# Altium PCB PCB1.PcbDoc
Units mm, origin at the board's own origin, x right, y up, seen from the top; angles counter-clockwise.
Board outline 67 x 62 mm, 4 copper layers (Top Layer, Mid-Layer 1, Mid-Layer 2, Bottom Layer), stack 1.448 mm thick; 30 components, 30 nets, 145 pads, 25 vias.
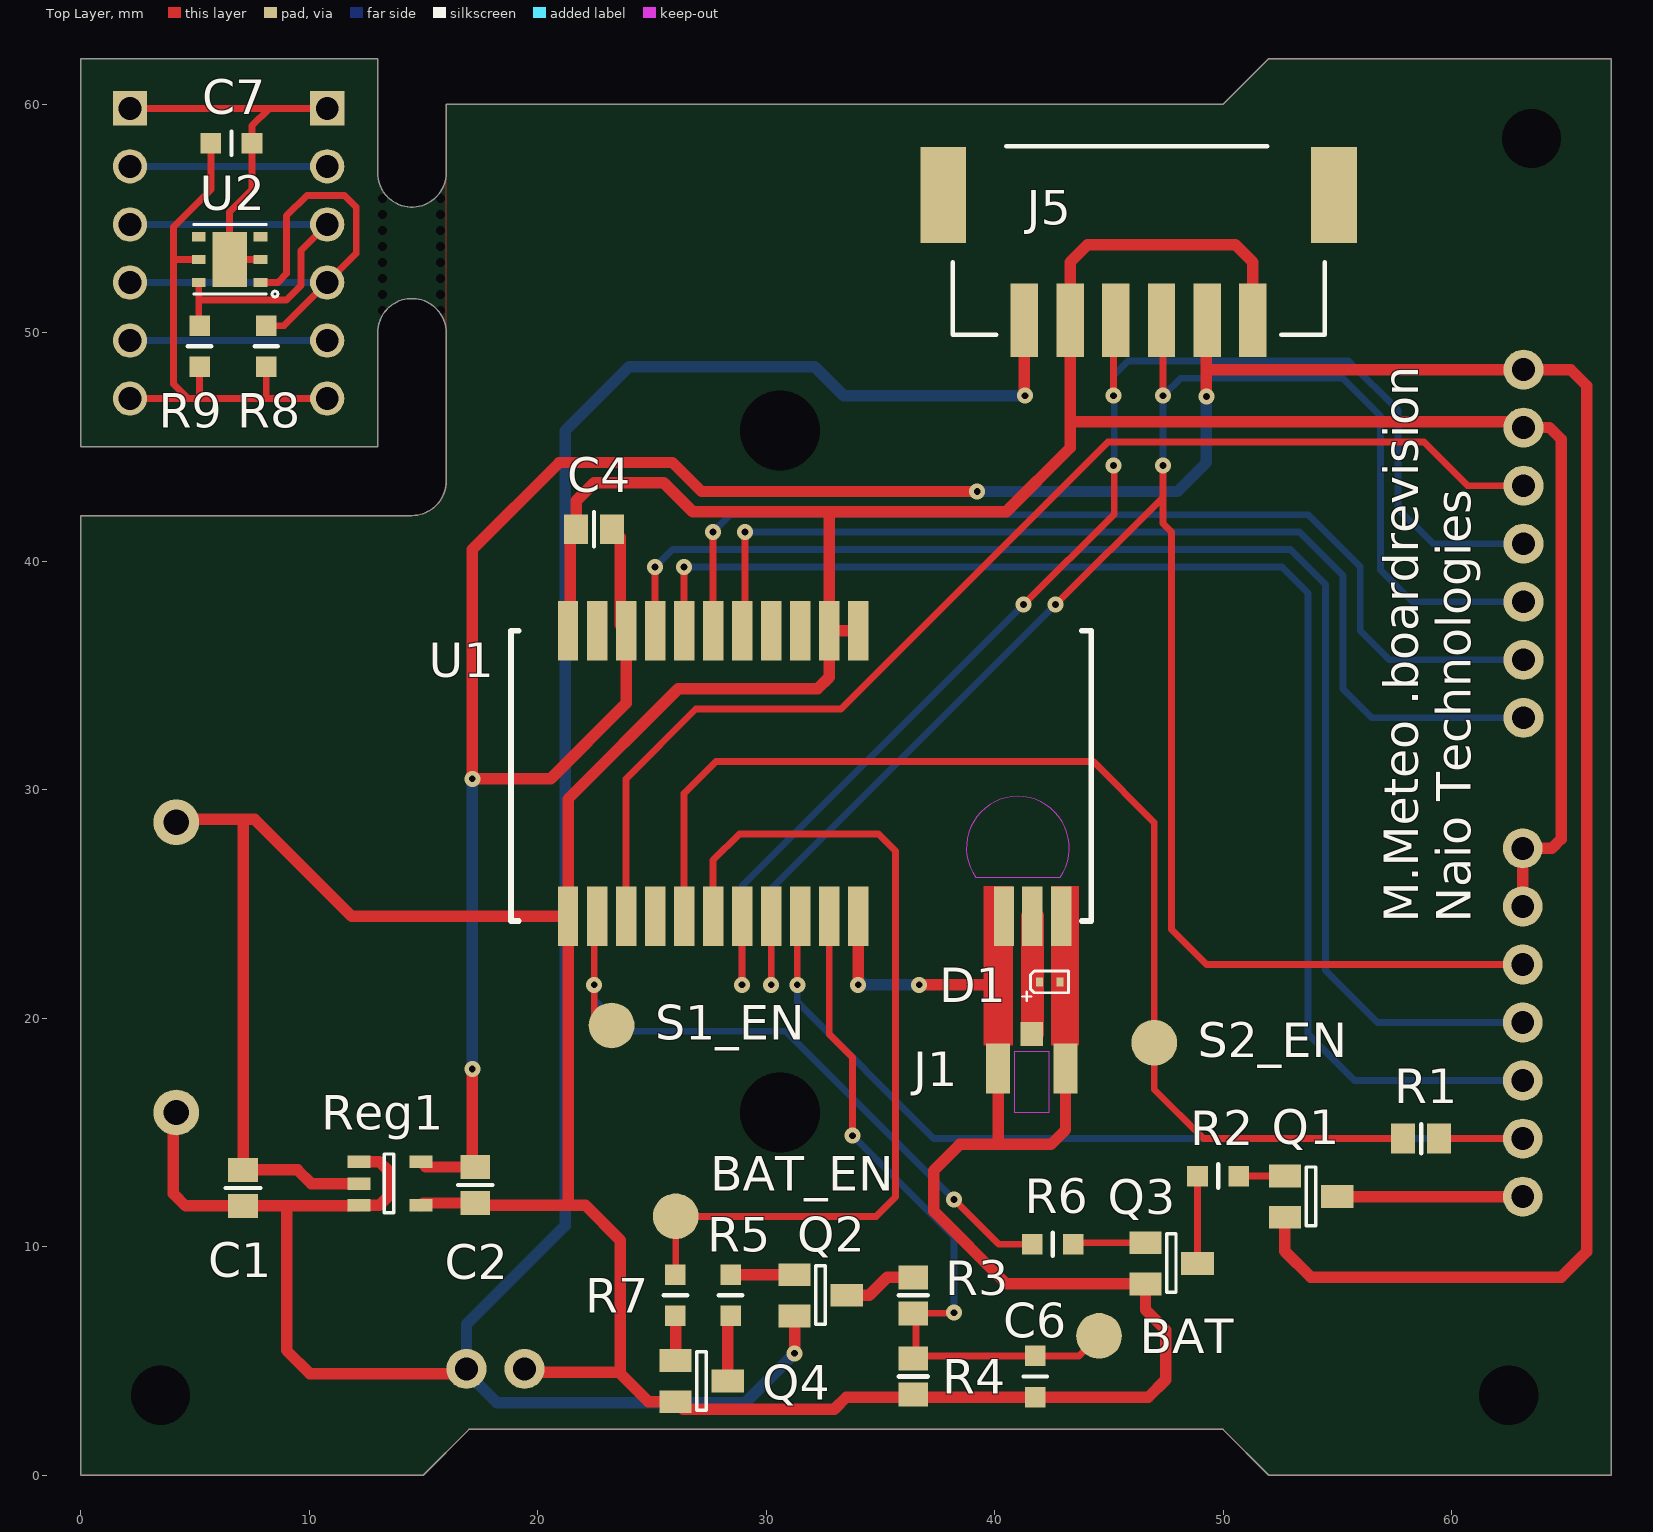
[diagram p0: Top Layer view]
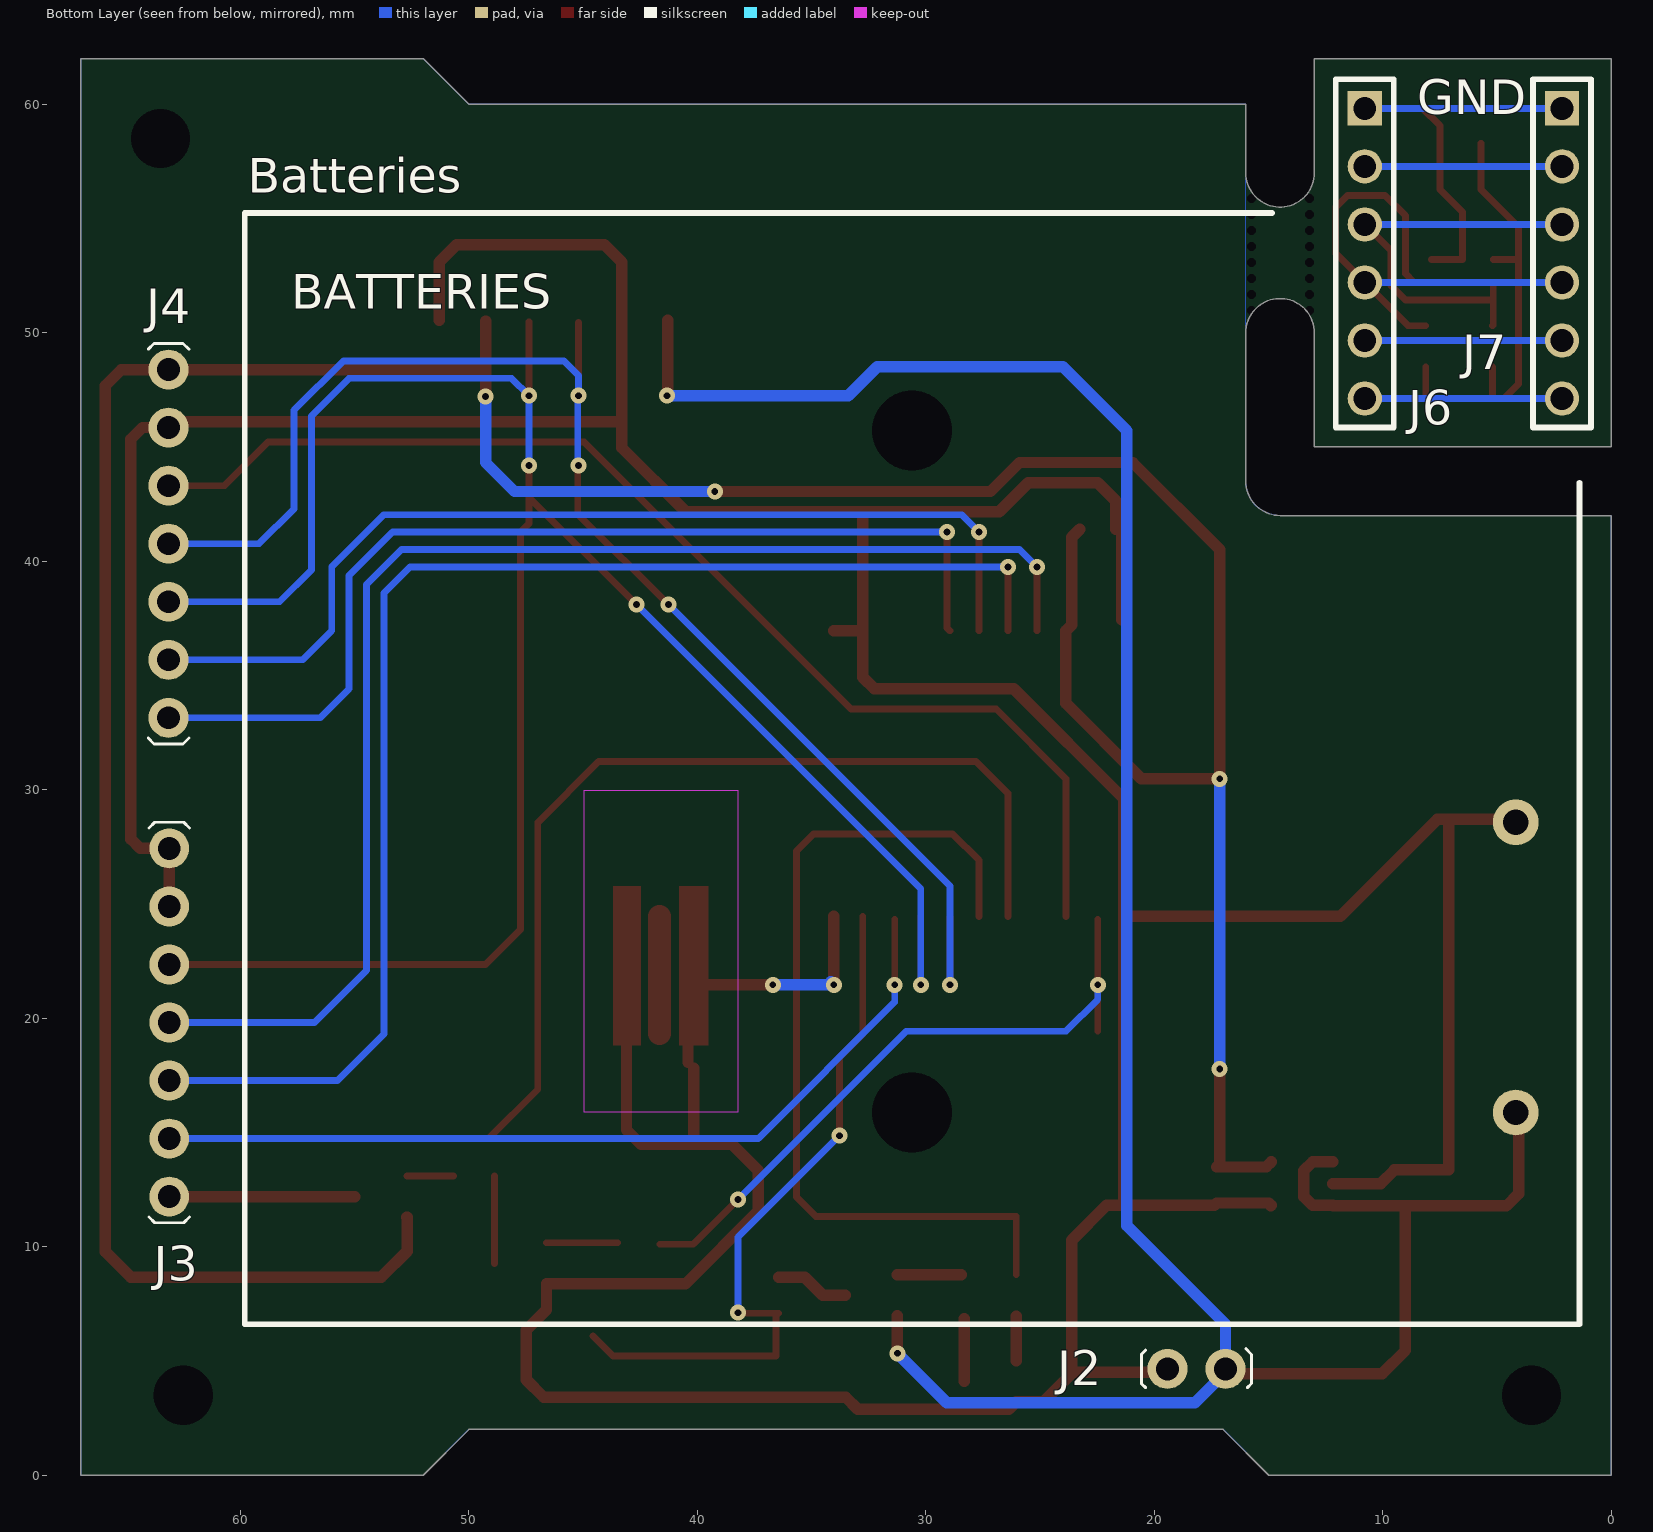
[diagram p1: Bottom Layer view, seen from below]
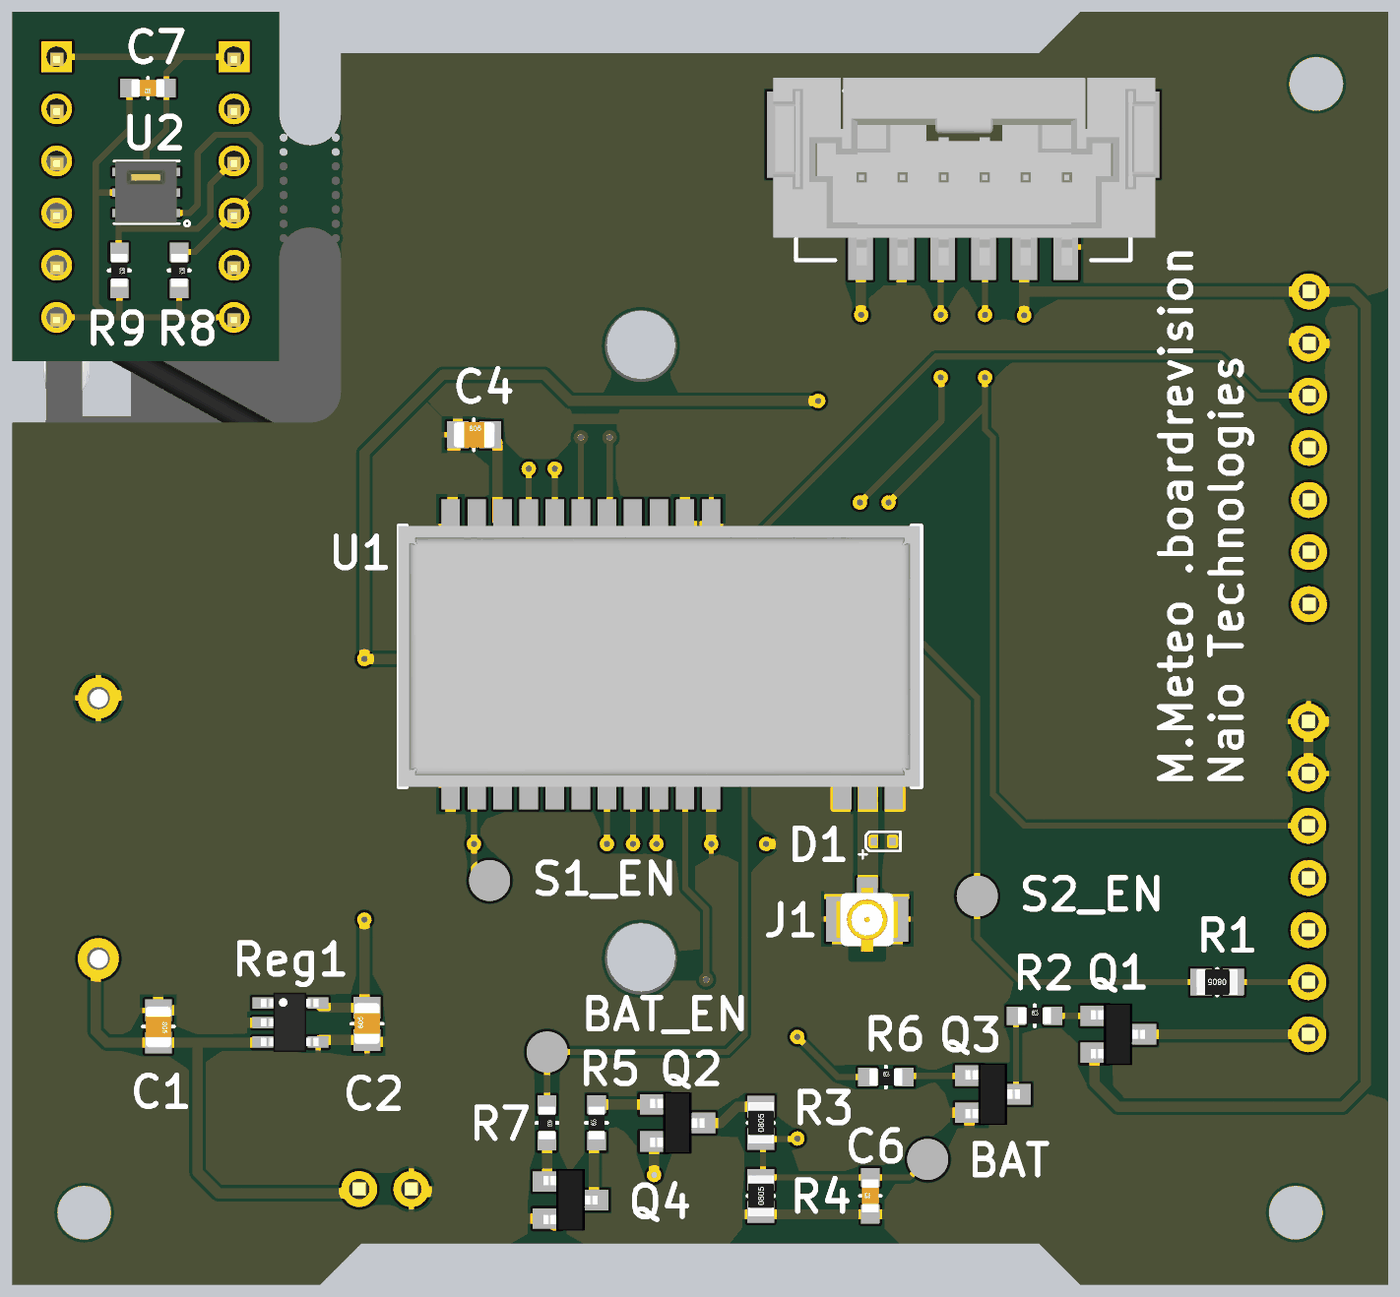
[diagram p2: 3D render of the assembled board from above, using the file's embedded part models]
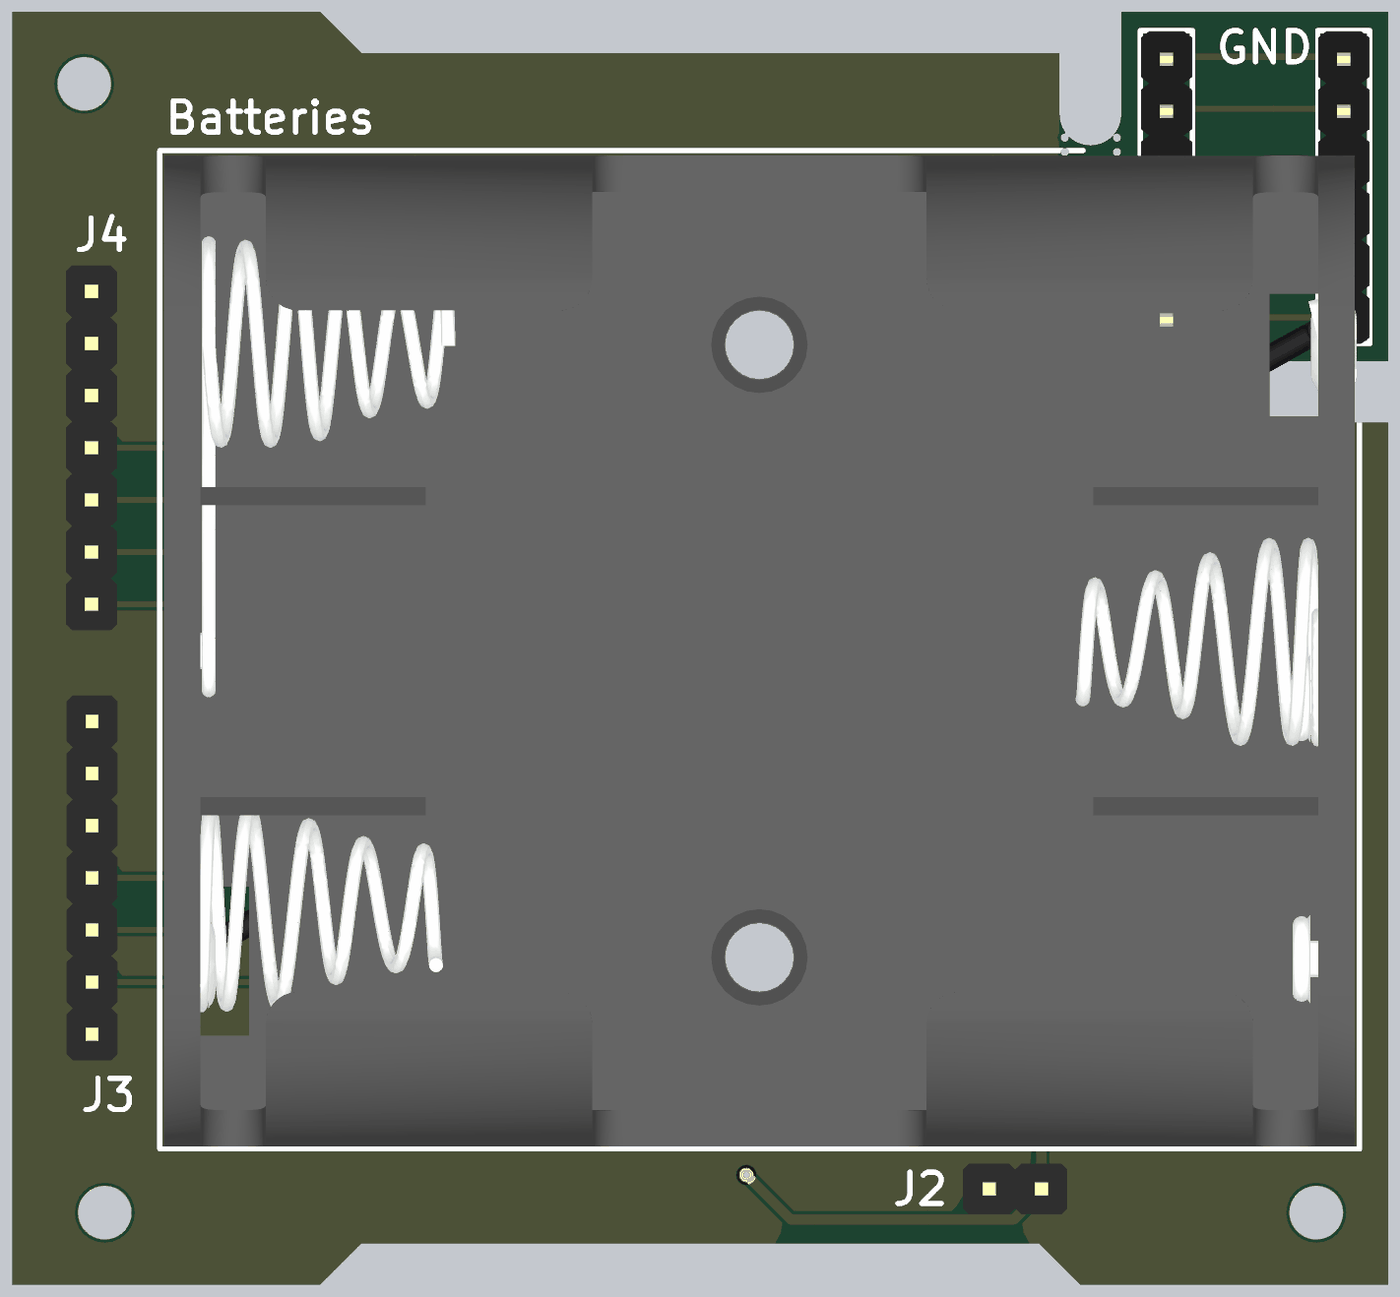
[diagram p3: 3D render of the assembled board from below, using the file's embedded part models]

## Layer stack, top to bottom
Top Solder: solder mask 0.0102, Solder Resist, Dk 3.5
Top Layer: signal copper 0.0356
Dielectric1: core 0.288, FR-4, Dk 4.8
Mid-Layer 1: signal copper 0.0356
Dielectric2: prepreg 0.73, FR-4, Dk 4.8
Mid-Layer 2: signal copper 0.0356
Dielectric3: core 0.288, FR-4, Dk 4.8
Bottom Layer: signal copper 0.0356
Bottom Solder: solder mask 0.0102, Solder Resist, Dk 3.5

## Board outline
0,0 0,42 14.5,42 ccw(c14.5,43.5) 16,43.5 16,50 ccw(c14.5,50) 13,50 13,45 0,45 0,62 13,62 13,57 ccw(c14.5,57) 16,57 16,60 50,60 52,62 67,62 67,0 52,0 50,2 17,2 15,0

## Design rules (kind name [scope] priority, off if disabled: settings)
AssemblyTestPointUsage [All] p1: valid=2
Clearance RF [InNet('RF')] p1: gap=0.2
Clearance [All] p2: gap=0.15
FabricationTestPointUsage [All] p1: valid=2 allowmultiple=FALSE
HoleSize [All] p1: absolutevalues=TRUE maxlimit=5 minlimit=0.025 maxpercent=80.000 minpercent=20.000
MinimumSolderMaskSliver [All] p1: minsoldermaskwidth=0.07
PolygonConnect [All] p1: connectstyle=Relief reliefconductorwidth=0.254 reliefentries=4 polygonreliefangle="90 Angle" airgapwidth=0.254
RoomDefinition schema [InComponentClass('schema')] p1: confinementstyle=ConfineIn formatcopy=TRUE lockcomponents=FALSE outline -8.001,-4.826 75.565,-4.826 75.565,66.421 -8.001,66.421
RoutingVias [All] p1: holewidth=0.3 width=0.7 viastyle="Through Hole" minholewidth=0.3 minwidth=0.7 maxholewidth=4 maxwidth=4
SilkToSilkClearance [All] p1: silktosilkclearance=0.1
SilkToSolderMaskClearance SilkscreenOverComponentPads [IsPad] p1: minsilkscreentomaskgap=0.125 clearancetoexposedcopper=TRUE
SolderMaskExpansion [All] p1: expansion=0.125
Width [All] p1: maxlimit=5 minlimit=0.15 preferedwidth=0.15
24 further rules are at their usual default settings.

## Classes and differential pairs
net class Undefined: SENSOR_1_EN SENSOR_2_EN VBAT VBAT_EN
component class schema: C1 C2 C4 C6 C7 D1 J1 J2 J3 J4 J5 J7 Q1 Q2 Q3 Q4 R1 R2 R3 R4 R5 R6 R7 R8 R9 Reg1 U1 U2

## Components (designator, comment, footprint, x,y, rotation, side; value= is the part's Value field where it differs from the comment)
Batteries "Comment" KEYSTONE-2464 30.607,15.875 r180 bottom
C1 "CAP-SMD" C0805-STD 7.112,12.573 r270 top
C2 "CAP-SMD" C0805-STD 17.272,12.7 r90 top
C4 "CAP-SMD" C0805-STD 22.479,41.402 r0 top
C6 "CAP-SMD" C0603-STD 41.783,4.318 r90 top
C7 "CAP-SMD" C0603-STD 6.604,58.293 r180 top
D1 "ESD9R33ST5G-SOD923" SOD923-SPE-ESD9R33ST5G 42.867,21.59 r180 top
J1 "COAX-RF" UFL_R_SMT1-STD 41.631,19.304 r180 top
J2 "CONN-STD-2P_1ROW" CONN-STD-2_254_STRAIGHT_HEADER 19.431,4.652 r180 bottom
J3 "CONN-STD-7P_1ROW" CONN-STD-7_254_STRAIGHT_HEADER 63.119,27.432 r270 bottom
J4 "CONN-STD-7P_1ROW" CONN-STD-7_254_STRAIGHT_HEADER 63.15,48.387 r270 bottom
J5 "CONN-STD-6P_1ROW" CONN-SPE-560020-0620_MOLEX 51.308,50.546 r180 top
J6 "CONN-STD-6P_1ROW" 6P_HEADER-STD_TH_1ROW 10.795,57.282 r90 bottom
J7 "CONN-STD-6P_1ROW" 6P_HEADER-STD_TH_1ROW 2.159,57.282 r90 bottom
Q1 "BC856A-SOT23" SOT23-STD 54.991,12.192 r180 top
Q2 "BC856A-SOT23" SOT23-STD 33.528,7.874 r180 top
Q3 "BC846ALT1-SOT23" SOT23-STD 48.884,9.271 r180 top
Q4 "BC846ALT1-SOT23" SOT23-STD 28.321,4.116 r180 top
R1 "RES-SMD" R0805-STD 58.674,14.732 r180 top
R2 "RES-SMD" R0603-STD 49.784,13.092 r0 top
R3 "RES-SMD" R0805-STD 36.449,7.874 r90 top
R4 "RES-SMD" R0805-STD 36.449,4.318 r90 top
R5 "RES-SMD" R0603-STD 28.448,7.874 r90 top
R6 "RES-SMD" R0603-STD 42.545,10.109 r0 top
R7 "RES-SMD" R0603-STD 26.035,7.874 r270 top
R8 "RES-SMD" R0603-STD 8.128,49.408 r270 top
R9 "RES-SMD" R0603-STD 5.207,49.408 r270 top
Reg1 "TPS706-SOT23_5" SOT23_5-SPE-TPS706 12.192,13.716 r0 top
U1 "TD1208-LGA25" LGA25-SPE-TD1208 34.036,36.957 r180 top
U2 "SHT21-DFN6" DFN6-SPE-SHT21 7.874,52.202 r90 top

## Footprints (in the part's own frame and the unit in brackets; to place one, negate y for a bottom-side part, rotate by r counter-clockwise, add the part's x,y. Pads: shape width x height; smd on the part's side, far side on the other; paste and mask are expansions set on the pad)
6P_HEADER-STD_TH_1ROW [mm] "6P TH header, 2.54mm pitch"
  rect 1.5x1.5 hole 1: 1(2.54,0)
  round 1.5 hole 1: 2(0,0) 3(-2.54,0) 4(-5.08,0) 5(-7.62,0) 6(-10.16,0)
  silkscreen extent -11.43,-1.27 3.81,1.27, body extent -11.46,-1.25 3.78,1.25, height 9.4
C0603-STD [mm]
  rect 0.9x0.9 smd: 1(-0.9,0) 2(0.9,0)
  silkscreen extent 0,-0.51 0,0.51, body extent -0.8,-0.4 0.8,0.4, height 0.3
C0805-STD [mm]
  rect 1.05x1.3 smd: 1(-0.787,0) 2(0.787,0)
  silkscreen extent 0,-0.76 0,0.76, body extent -0.98,-0.62 1.02,0.62, height 0.76
CONN-SPE-560020-0620_MOLEX [mm]
  rect 1.2x3.2 smd: 1(0,0) 2(2,0) 3(4,0) 4(6,0) 5(8,0) 6(10,0)
  rect 2x4.2 smd: M1(-3.55,-5.48) M2(13.55,-5.48)
  silkscreen extent -3.15,-7.62 13.15,0.64, body extent -4.35,-8.26 14.25,0.89, height 7.99
CONN-STD-2_254_STRAIGHT_HEADER [mm]
  round 1.75 hole 1: 1(0,0) 2(2.54,0)
  silkscreen extent -1.14,-0.83 3.68,0.89, body extent -1.27,-1.24 3.81,1.25, height 8.54
CONN-STD-7_254_STRAIGHT_HEADER [mm]
  round 1.75 hole 1: 1(0,0) 2(2.54,0) 3(5.08,0) 4(7.62,0) 5(10.16,0) 6(12.7,0) 7(15.24,0)
  silkscreen extent -1.14,-0.89 16.38,0.89, body extent -1.27,-1.24 16.51,1.25, height 8.54
DFN6-SPE-SHT21 [mm]
  rect 0.4x0.6 smd: 1(0,0) 2(1,0) 3(2,0) 4(2,2.7) 5(1,2.7) 6(0,2.7)
  rect 2.4x1.5 smd: 2(1,1.35)
  silkscreen extent -0.63,-0.76 2.54,2.92, body extent -0.48,-0.13 2.52,2.87, height 1.05
KEYSTONE-2464 [mm]
  round 2 hole 1.1: 1(26.42,0) 2(26.42,12.7)
  round 1.524 hole 3.5 unplated: X(0,0) X(0,29.85)
  silkscreen extent -29.21,-9.27 29.21,39.37, body extent -29.01,-9.16 29.08,39.13, height 16.9
LGA25-SPE-TD1208 [mm]
  rect 0.89x2.6 smd: 1(0,0) 2(1.27,0) 3(2.54,0) 4(3.81,0) 5(5.08,0) 6(6.35,0) 7(7.62,0) 8(8.89,0) 9(10.16,0) 10(11.43,0) 11(12.7,0) 12(12.7,12.5) 13(11.43,12.5) 14(10.16,12.5) 15(8.89,12.5) 16(7.62,12.5) 17(6.35,12.5) 18(5.08,12.5) 19(3.81,12.5) 20(2.54,12.5) 21(1.27,12.5) 22(0,12.5) 23(-6.38,12.5) 24(-7.62,12.5) 25(-8.89,12.5)
  Top Layer keep-out region: -8.831,10.795 -9.221,9.786 -9.095,8.711 -8.483,7.818 -7.526,7.314 -6.444,7.314 -5.487,7.818 -4.875,8.711 -4.749,9.786 -5.139,10.795 -5.139,10.795
  silkscreen extent -10.2,0 15.2,12.7, body extent -10.16,0 15.24,12.7, height 3.55
R0603-STD [mm]
  rect 0.9x0.9 smd: 1(-0.9,0) 2(0.9,0)
  silkscreen extent 0,-0.51 0,0.51, body extent -0.8,-0.4 0.8,0.4, height 0.3
R0805-STD [mm]
  rect 1.05x1.3 smd: 1(-0.787,0) 2(0.787,0)
  silkscreen extent 0,-0.64 0,0.64, body extent -1,-0.64 1,0.61, height 0.6
SOD923-SPE-ESD9R33ST5G [mm]
  rect 0.3x0.4 smd: A(0,0) K(0.9,0)
  silkscreen extent -0.38,-0.48 1.65,0.83, body extent -0.07,-0.32 0.97,0.32, height 0.43
SOT23-STD [mm]
  rect 1.4x1 smd: 1(2.275,-0.9) 2(2.275,0.9)
  rect 1.425x1 smd: 3(0,0)
  silkscreen extent 0.94,-1.3 1.35,1.27, body extent -0.18,-1.5 2.46,1.5, height 1.08
SOT23_5-SPE-TPS706 [mm]
  rect 1x0.55 smd: 1(0,-0.005) 2(0,-0.955) 3(0,-1.905) 4(2.7,-1.905) 5(2.7,-0.005)
  silkscreen extent 1.11,-2.23 1.51,0.34, body extent -0.08,-2.39 2.72,0.51, height 1.43
UFL_R_SMT1-STD [mm]
  rect 1x1.05 smd: 1(0,0)
  rect 1.05x2.2 smd: 2(-1.475,1.5) 2(1.475,1.5)
  Top Layer keep-out region: -0.762,0.762 0.762,0.762 0.762,3.429 -0.762,3.429
  body extent -1.5,-0.03 1.5,3.07, height 1.25

## Part data
C1: library part C0805C105K4RACxx, "0805 1uF / 16V X7R ceramic capacitor"
C2: library part C0805C225K4RACxx, "0805 2.2uF / 16V X7R ceramic capacitor"
C4: library part C0805C106K9PACxx, "0805 10uF / 6.3V X5R ceramic capacitor"
C6 C7: library part C0603C104K3RACXX, "0603 100nF /25V X7R ceramic capacitor"
D1: library part ESD9R3.3ST5G, "Diode TVS 3.3V in SMD package"
J1: library part UFL_R_SMT1, "UF.L-R-SMT-1 SMD connector"
J2: library part 640456-2, "2 PIN, 2.54mm pitch, 1 row, straight, male"
J3 J4: library part 640456-7, "7 PIN, 2.54mm pitch, 1 row, straight, male"
J5: library part 560020-0620, "6 pin, 2mm pitch herader, SM, ST"
J6 J7: library part 68000-406HLF, "6P, 1 row, 2.54mm header"
Q1 Q2: library part BC856A, "PNP small signal transistor"
Q3 Q4: library part BC846ALT1, "NPN small signal transistor"
R1: library part CRCW080530K0FKxx, "30k Ohm 0805 SMD resistor"
R2 R5: library part CRCW06031K00FKxx, "1k Ohm 0603 SMD resistor"
R3 R4: library part CRCW0805100KFKxx, "100k Ohm 0805 SMD resistor"
R6 R7: library part CRCW060322K0FKxx, "22k Ohm 0603 SMD resistor"
R8 R9: library part CRCW06032K00FKxx, "2k Ohm 0603 SMD resistor"
Reg1: library part TPS70633, "3.3V / 200mA LDO voltage regulator"
U1: library part TD1208-C32, "Sigfox module"
U2: library part SHT21, "I2C Humidity/Temperature sensor"

## Free pads (board coordinates)
  round 2 smd: 2(23.241,19.685) 2(26.046,11.328) 2(44.577,6.096) 2(46.99,18.923)
  round 0 hole 2.6: X(3.5,3.5) X(62.5,3.5) X(63.5,58.5)
  round 0 hole 0.4 unplated: X(13.208,50.98) X(13.208,51.68) X(13.208,52.38) X(13.208,53.08) X(13.208,53.78) X(13.208,54.48) X(13.208,55.18) X(13.208,55.88) X(15.748,50.98) X(15.748,51.68) X(15.748,52.38) X(15.748,53.08) X(15.748,53.78) X(15.748,54.48) X(15.748,55.18) X(15.748,55.88)

## Via types
v1: diameter 0.7, hole 0.3, Top Layer to Bottom Layer, 22 vias
v2: diameter 0.7, hole 0.3, Top Layer to Bottom Layer, tented both sides, 3 vias

## Nets (pads, with @x,y where several pads share a name; then routed paths per layer and width w, separated by ;. In a path a pad name is that pad's centre, name@x,y a point inside that pad or via, vN(x,y) a via of type N, cw(c..) or ccw(c..) an arc to the next point about the centre after c; other vN are vias at no path point)
3.3V: C2.2 C4.2 J4.1 J5.2 Q1.2 Reg1.5 U1.9 | length 157.2
  Top Layer w0.5: Reg1.5 15.116,13.487 C2.2 17.145,13.614 v1(17.145,17.78) ; C4.2 23.622,41.046 23.622,37.211 U1.9 23.876,33.782 20.574,30.48 v1(17.145,30.48) 17.145,40.513 20.955,44.323 25.908,44.323 27.178,43.053 v1(39.243,43.053) ; v1(49.276,47.213) 49.276,48.387 ; J5.2@49.276,50.514 49.276,48.387 ; Q1.2 52.705,11.281 52.705,9.804 53.848,8.661 64.795,8.661 65.913,9.779 65.913,47.688 65.214,48.387 J4.1 ; J4.1@62.992,48.545 J4.1 ; 49.276,48.387 J4.1
  Bottom Layer w0.5: v1(17.145,17.78) v1(17.145,30.48) ; v1(39.243,43.053) 48.006,43.053 49.276,44.323 v1(49.276,47.213)
5V: Batteries.1 C1.2 J2.2 J5.6 Q2.2 Reg1.1 Reg1.3 | length 116.1
  Top Layer w0.5: Batteries.1@4.06,16.002 4.06,12.323 4.597,11.786 C1.2 Reg1.3@12.167,11.786 ; 9.017,11.713 9.017,5.461 10.033,4.445 J2.2@16.826,4.445 ; Reg1.3 13.081,11.811 13.462,12.192 13.462,13.33 13.081,13.711 Reg1.1 ; v1(31.253,5.334) Q2.2 ; J5.6 41.308,47.277 v1(41.341,47.244)
  Bottom Layer w0.5: v1(31.253,5.334) 29.094,3.175 18.226,3.175 16.891,4.51 16.891,6.604 21.209,10.922 21.209,45.72 24.003,48.514 32.131,48.514 33.401,47.244 v1(41.341,47.244)
DB2: J4.6 U1.6 | length 44.4
  Top Layer w0.3: U1.6 v2(27.686,41.275)
  Bottom Layer w0.3: v2(27.686,41.275) 28.448,42.037 53.721,42.037 56.007,39.751 56.007,36.957 57.277,35.687 J4.6
DB3: J4.7 U1.5 | length 44.7
  Top Layer w0.3: U1.5 29.083,37.084 v2(29.083,41.275)
  Bottom Layer w0.3: v2(29.083,41.275) 53.34,41.275 55.245,39.37 55.245,34.417 56.515,33.147 J4.7
GND: Batteries.2 C1.1 C2.1 C4.1 C6.1 D1.A J1.2 J2.1 J3.1 J3.2 J4.2 J5.1 J5.5 Q3.2 Q4.2 R4.1 Reg1.2 Reg1.4 U1.1 U1.2 U1.11 U1.12 U1.22 U1.23 U1.25 | length 267.9
  Top Layer w0.5: Batteries.2@4.06,28.702 6.985,28.702 ; Reg1.2 10.099,12.761 9.5,13.36 C1.1 7.112,28.575 6.985,28.702 ; Reg1.4 Reg1.4@14.917,11.786 ; Reg1.4@14.994,11.913 C2.1 ; C2.1@17.374,11.811 21.336,11.811 ; J2.1@19.431,4.51 23.56,4.51 24.854,3.216 Q4.2 26.378,2.884 32.983,2.884 33.517,3.418 C6.1 46.736,3.418 47.498,4.18 47.498,6.35 46.609,7.239 Q3.2 40.524,8.371 37.338,11.557 37.338,13.335 38.481,14.478 42.471,14.478 43.106,15.113 43.106,17.804 43.106,21.352 D1.A@42.926,21.531 ; U1.11@21.438,37.44 C4.1@21.438,41.529 ; C4.1 21.692,42.647 22.479,43.434 25.527,43.434 26.797,42.164 40.513,42.164 43.308,44.959 43.308,45.846 ; 23.622,4.572 23.622,10.287 22.098,11.811 21.336,11.811 ; 32.766,42.164 U1.2 ; v1(34.036,21.463) U1.22 ; U1.1 U1.2 ; v1(36.703,21.463) 40.162,21.463 40.289,21.59 40.416,21.463 ; J1.2@40.156,17.804 40.156,14.581 40.259,14.478 ; J1.2@40.416,18.064 40.416,21.463 ; U1.23 40.416,21.463 ; D1.A@42.926,21.649 U1.25 ; 43.308,45.848 J5.5 43.308,53.087 44.069,53.848 50.546,53.848 51.308,53.086 J5.1 ; 43.308,46.101 62.896,46.101 J4.2 63.155,45.852 64.291,45.852 64.795,45.348 64.795,27.838 64.389,27.432 J3.1 J3.2 ; 6.985,28.702 7.62,28.702 11.865,24.457 U1.12 ; 21.336,11.811 U1.12 ; U1.12 21.336,29.591 26.162,34.417 32.258,34.417 32.766,34.925 U1.2
  Bottom Layer w0.5: v1(34.036,21.463) 34.163,21.59 34.29,21.463 v1(36.703,21.463)
NetC7_1: C7.1 J6.1 J7.1 U2.2 | length 26
  Top Layer w0.3: J7.1 8.266,59.822 ; U2.2@7.874,53.202 6.524,53.202 6.524,55.286 7.504,56.266 7.504,59.06 8.266,59.822 ; J6.1 8.266,59.822
  Bottom Layer w0.3: J7.1 J6.1
NetC7_2: C7.2 J6.6 J7.6 R8.2 R9.2 U2.5 | length 33.3
  Top Layer w0.3: J7.6 4.699,47.122 ; U2.5 4.076,53.202 4.06,53.218 ; R9.2 5.207,47.122 ; C7.2 5.704,56.266 4.06,54.622 4.06,53.218 ; R8.2 8.128,47.122 ; J6.6 8.128,47.122 ; 4.06,53.218 4.06,47.761 4.699,47.122 ; 4.699,47.122 5.207,47.122 ; 5.207,47.122 8.128,47.122
  Bottom Layer w0.3: J7.6 J6.6
NetJ6_2: J6.2 J7.2 | length 8.6
  Bottom Layer w0.3: J7.2 J6.2
NetJ6_3: J6.3 J7.3 R9.1 U2.6 | length 18.4
  Top Layer w0.3: U2.6 5.174,51.44 ; R9.1 5.174,50.341 5.174,51.44 ; J6.3 9.652,53.599 9.652,52.075 9.017,51.44 5.174,51.44
  Bottom Layer w0.3: J7.3 J6.3
NetJ6_4: J6.4 J7.4 R8.1 U2.1 | length 23.4
  Top Layer w0.3: U2.1 8.636,52.202 9.017,52.583 9.017,55.123 9.906,56.012 11.557,56.012 12.065,55.504 12.065,53.472 J6.4 8.901,50.308 R8.1
  Bottom Layer w0.3: J7.4 J6.4
NetJ6_5: J6.5 J7.5 | length 8.6
  Bottom Layer w0.3: J7.5 J6.5
NetQ1_1: Q1.1 R2.2 | length 2
  Top Layer w0.3: R2.2 Q1.1
NetQ2_1: Q2.1 R5.2 | length 2.8
  Top Layer w0.5: R5.2 Q2.1
NetQ2_3: Q2.3 R3.2 | length 3.2
  Top Layer w0.5: Q2.3 34.519,7.874 35.306,8.661 R3.2
NetQ3_1: Q3.1 R6.2 | length 3.1
  Top Layer w0.3: R6.2@43.507,10.171 Q3.1
NetQ3_3: Q3.3 R2.1 | length 3.8
  Top Layer w0.3: Q3.3 R2.1
NetQ4_1: Q4.1 R7.2 | length 1.9
  Top Layer w0.5: Q4.1 R7.2@26.046,6.963
NetQ4_3: Q4.3 R5.1 | length 2.7
  Top Layer w0.5: Q4.3 R5.1@28.321,6.847
RF: D1.K J1.1 U1.24 | length 5.1
  Top Layer w1: J1.1@41.656,19.329 41.656,21.59 U1.24
RST: J4.3 U1.14 | length 52.2
  Top Layer w0.3: U1.14 23.876,30.48 26.924,33.528 33.274,33.528 44.958,45.212 58.801,45.212 60.706,43.307 J4.3
RX: J3.3 J4.5 J5.3 U1.19 | length 98.3
  Top Layer w0.3: v1(30.226,21.463) U1.19 ; v1(42.673,38.101) 47.371,42.799 ; v1(47.371,44.196) 47.371,42.799 ; v1(47.371,47.244) J5.3@47.371,50.483 ; J3.3 49.276,22.352 47.752,23.876 47.752,41.275 47.371,41.656 47.371,42.799
  Bottom Layer w0.3: v1(30.226,21.463) 30.226,25.654 v1(42.673,38.101) ; v1(47.371,44.196) v1(47.371,47.244) 48.133,48.006 55.245,48.006 56.896,46.355 56.896,39.624 58.293,38.227 J4.5
SCL: J3.4 U1.8 | length 59.6
  Top Layer w0.3: U1.8 v1(25.146,39.751)
  Bottom Layer w0.3: v1(25.146,39.751) 25.908,40.513 52.959,40.513 54.483,38.989 54.483,22.098 56.769,19.812 J3.4
SDA: J3.5 U1.7 | length 60.1
  Top Layer w0.3: U1.7 v1(26.416,39.751)
  Bottom Layer w0.3: v1(26.416,39.751) 52.578,39.751 53.721,38.608 53.721,19.304 55.753,17.272 J3.5
SENSOR_1_EN: pad.2@23.241,19.685 R6.1 U1.13 | length 29.1
  Top Layer w0.3: pad.2@22.479,19.431 v1(22.479,21.463) U1.13@22.479,24.33 ; v1(38.227,12.065) 40.183,10.109 R6.1
  Bottom Layer w0.3: v1(22.479,21.463) 22.479,20.828 23.876,19.431 30.861,19.431 v1(38.227,12.065)
SENSOR_1_PWR: J3.7 Q1.3 | length 8.1
  Top Layer w0.5: Q1.3 J3.7
SENSOR_2: J3.6 R1.1 U1.20 | length 41.5
  Top Layer w0.3: v1(31.369,21.463) U1.20@31.369,24.33 ; R1.1 J3.6
  Bottom Layer w0.3: v1(31.369,21.463) 31.369,20.701 37.338,14.732 J3.6
SENSOR_2_EN: pad.2@46.99,18.923 R1.2 U1.16 | length 51.4
  Top Layer w0.3: U1.16 26.416,29.845 27.813,31.242 44.323,31.242 46.99,28.575 pad.2@46.99,18.669 ; pad.2@46.99,18.923 pad.2@46.99,18.669 ; R1.2 49.149,14.732 46.99,16.891 pad.2@46.99,18.669
TX: J4.4 J5.4 U1.18 | length 63.7
  Top Layer w0.3: v1(28.956,21.463) U1.18 ; v1(41.275,38.101) 45.243,42.069 45.243,44.196 v1(45.212,44.196) ; v1(45.212,47.244) J5.4@45.212,50.45
  Bottom Layer w0.3: v1(28.956,21.463) 28.956,25.782 v1(41.275,38.101) ; v1(45.212,44.196) 45.243,44.227 45.243,47.213 v1(45.212,47.244) 45.212,48.133 45.847,48.768 55.499,48.768 57.658,46.609 57.658,42.291 59.182,40.767 J4.4
VBAT: C6.2 pad.2@44.577,6.096 R3.1 R4.2 U1.21 | length 31.5
  Top Layer w0.3: U1.21 32.766,19.304 33.782,18.288 v2(33.782,14.859) ; R3.1 38.202,7.087 v1(38.227,7.112) ; R3.1@36.562,6.974 36.562,5.218 C6.2 43.699,5.218 pad.2@44.577,6.096
  Bottom Layer w0.3: v2(33.782,14.859) 38.227,10.414 v1(38.227,7.112)
VBAT_EN: pad.2@26.046,11.328 R7.1 U1.17 | length 38.9
  Top Layer w0.3: R7.1@26.046,8.785 26.046,11.328 34.823,11.328 35.672,12.177 35.672,27.32 34.925,28.067 28.837,28.067 27.686,26.916 U1.17
pads on no net: Batteries.X J5.M1 J5.M2 U1.3 U1.4 U1.10 U1.15 U2.3 U2.4

## Polygon pours and split planes (outlines as drawn)
GND on Bottom Layer "GND_BTM" (solid, remove dead copper, shelved, pour order 12): 0,0 0,42 14.5,42 ccw(c14.5,43.5) 16,43.5 16,60 50,60 52,62 67,62 67,0 52,0 50,2 17,2 15,0
GND on Top Layer "GND_TOP" (solid, remove dead copper, shelved, pour order 13): 0,0 0,42 14.5,42 ccw(c14.5,43.5) 16,43.5 16,60 50,60 52,62 67,62 67,0 52,0 50,2 17,2 15,0

## Keep-outs
Bottom Layer:
  rectangle: 38.227,15.875 44.958,29.972

## Other copper
Top Layer:
  rectangle net GND: 42.471,18.796 43.688,25.781
  rectangle net GND: 39.523,18.796 40.816,25.781

## Silkscreen, mask and mechanical layers (free items; w line width, h text height)
Top Overlay:
  text "M.Meteo .boardrevision / Naio Technologies" at 60.833,24.181 h1.52 r90
  text "S1_EN" at 25.146,19.05 h1.52
  text "S2_EN" at 48.884,18.288 h1.52
  text "BAT_EN" at 27.559,12.446 h1.52
  text "BAT" at 46.355,5.334 h1.52
  text ".ASsyDocumentNumber" at 179.784,-98.052 h1.52
Bottom Overlay:
  text "GND" at 8.509,59.563 h1.52
  text ".ASsyDocumentNumber" at -75.192,-98.436 h1.52
cutout:
  the board outline again, w0.3
Mechanical 16:
  drawing of 2594 lines, arcs and shapes, not listed
  text "1" at -118.995,173.163 h1.78
  text "2" at -69.956,173.163 h1.78
  text "3" at -20.697,173.163 h1.78
  text "4" at 28.596,173.163 h1.78
  text "5" at 77.872,173.163 h1.78
  text "6" at 126.894,173.163 h1.78
  text "7" at 176.424,173.163 h1.78
  text "8" at 225.446,173.163 h1.78
  text "A" at -141.127,139.178 h1.78
  text "A" at 247.493,139.178 h1.78
  text "B" at -141.127,68.566 h1.78
  text "B" at 247.493,68.566 h1.78
  text "C" at -141.127,-2.046 h1.78
  text "C" at 247.493,-2.046 h1.78
  text "D" at -141.127,-72.15 h1.78
  text "D" at 247.493,-72.15 h1.78
  text "Verifie par:" at 132.558,-72.328 h1.14
  text "Nom de la carte:" at 170.658,-72.328 h1.14
  text ".VerifEngineer" at 138.184,-75.524 h1.52
  text ".boardName" at 182.664,-75.908 h1.52
  text "Nom du Projet" at 170.531,-78.678 h1.14
  text "dessine par:" at 132.558,-79.821 h1.14
  text ".projectTitle" at 182.984,-82.308 h1.52
  text ".designEngineer" at 138.376,-83.012 h1.52
  text "DATE:" at 132.558,-87.568 h1.14
  text "PART NO.:" at 170.658,-87.568 h1.14
  text "Revision" at 223.998,-87.568 h1.14
  text "12 Avenue de l'Europe" at 98.679,-87.63 h1.52
  text ".PRINT_DATE" at 133.828,-90.616 h1.78
  text "31520 RAMONVILLE" at 103.022,-91.059 h1.52
  text ".boardrevision" at 224.409,-91.059 h1.52
  text ".boardPartNumber" at 179.336,-91.076 h1.52
  text "NOM DU FICHIER:" at 132.558,-95.188 h1.14
  text "Document: No:" at 170.658,-95.188 h1.14
  text "Echelle:" at 223.998,-95.188 h1.14
  text "1:1" at 229.96,-97.796 h1.52
  text ".PCB_FILE_NAME_NO_PATH" at 132.08,-98.298 h1.78
  text "1" at -118.995,-103.697 h1.78
  text "2" at -69.956,-103.697 h1.78
  text "3" at -20.697,-103.697 h1.78
  text "4" at 28.596,-103.697 h1.78
  text "5" at 77.872,-103.697 h1.78
  text "6" at 126.894,-103.697 h1.78
  text "7" at 176.424,-103.697 h1.78
  text "8" at 225.446,-103.697 h1.78
Drill Drawing:
  text ".Legend" at 100.838,16.398 h1.52
  text "!! Place stackup legend here !!" at -111.224,-20.164 h1.52
  text "NOTA : Toutes les dimensions en mm" at 95.752,-67.652 h1.52
  text ".DrillDocumentNumber" at 178.568,-98.116 h1.52
Mechanical 17:
  lines w0.127: -143.068,-34.799 -137.988,-34.799 ; -143.068,35.686 -137.988,35.686 ; -143.068,106.171 -137.988,106.171 ; -137.988,-92.584 -23.688,-92.584 ; -137.988,-84.964 -23.688,-84.964 ; -115.128,-100.204 -115.128,-84.964 ; -93.792,-105.284 -93.792,-100.204 ; -93.792,171.576 -93.792,176.656 ; -61.788,-100.204 -61.788,-84.964 -61.788,-69.724 ; -61.788,-77.344 -23.688,-77.344 ; -44.516,-105.284 -44.516,-100.204 ; -44.516,171.576 -44.516,176.656 ; 4.633,-105.284 4.633,-100.204 ; 4.633,171.576 4.633,176.656 ; 53.782,-105.284 53.782,-100.204 ; 53.782,171.576 53.782,176.656 ; 103.058,-105.284 103.058,-100.204 ; 103.058,171.576 103.058,176.656 ; 152.207,-105.284 152.207,-100.204 ; 152.207,171.576 152.207,176.656 ; 201.356,-105.284 201.356,-100.204 ; 201.356,171.576 201.356,176.656 ; 245.552,-34.799 250.632,-34.799 ; 245.552,35.686 250.632,35.686 ; 245.552,106.171 250.632,106.171 ; -137.988,-100.204 245.552,-100.204 245.552,171.576 -137.988,171.576 -137.988,-100.204 ; -137.988,-100.204 -23.688,-100.204 ; -137.988,-100.204 -137.988,-69.724 -61.788,-69.724 ; -61.788,-69.724 -23.688,-69.724 ; -23.688,-100.204 11.872,-100.204 11.872,-69.724 -23.688,-69.724 ; -23.688,-100.204 -23.688,-69.724 ; -143.068,-105.284 250.632,-105.284 250.632,176.656 -143.068,176.656 -143.068,-105.284
  text "8" at -117.846,173.227 h1.78
  text "7" at -68.824,173.227 h1.78
  text "6" at -19.294,173.227 h1.78
  text "5" at 29.728,173.227 h1.78
  text "4" at 79.004,173.227 h1.78
  text "3" at 128.297,173.227 h1.78
  text "2" at 177.556,173.227 h1.78
  text "1" at 226.595,173.227 h1.78
  text "A" at -139.893,139.242 h1.78
  text "A" at 248.727,139.242 h1.78
  text "B" at -139.893,68.63 h1.78
  text "B" at 248.727,68.63 h1.78
  text "C" at -139.893,-1.982 h1.78
  text "C" at 248.727,-1.982 h1.78
  text "Nom de la carte:" at -62.357,-71.501 h1.14
  text "Verifie par:" at -24.257,-71.501 h1.14
  text "D" at -139.893,-72.086 h1.78
  text "D" at 248.727,-72.086 h1.78
  text ".VerifEngineer" at -30.584,-75.46 h1.52
  text ".boardName" at -75.064,-75.844 h1.52
  text "Nom du Projet" at -62.23,-77.851 h1.14
  text "dessine par:" at -24.257,-78.994 h1.14
  text ".projectTitle" at -75.384,-82.244 h1.52
  text ".designEngineer" at -30.776,-82.948 h1.52
  text "Revision" at -115.697,-86.741 h1.14
  text "PART NO.:" at -62.357,-86.741 h1.14
  text "DATE:" at -24.257,-86.741 h1.14
  text ".boardrevision" at -116.205,-89.662 h1.52
  text ".PRINT_DATE" at -26.228,-90.552 h1.78
  text ".boardPartNumber" at -71.736,-91.012 h1.52
  text "Echelle:" at -115.697,-94.361 h1.14
  text "Document: No:" at -62.357,-94.361 h1.14
  text "NOM DU FICHIER:" at -24.257,-94.361 h1.14
  text ".PCB_FILE_NAME_NO_PATH" at -26.228,-98.172 h1.78
  text "1:1" at -122.104,-98.372 h1.52
  text "8" at -117.846,-103.633 h1.78
  text "7" at -68.824,-103.633 h1.78
  text "6" at -19.294,-103.633 h1.78
  text "5" at 29.728,-103.633 h1.78
  text "4" at 79.004,-103.633 h1.78
  text "3" at 128.297,-103.633 h1.78
  text "2" at 177.556,-103.633 h1.78
  text "1" at 226.595,-103.633 h1.78

## Text inside footprints (layer, text, board x,y; h text height)
Batteries: Bottom Overlay "BATTERIES" at 57.785,51.054 h1.52